# EAGLE board VCO eagle (EAGLE 6.6.0)
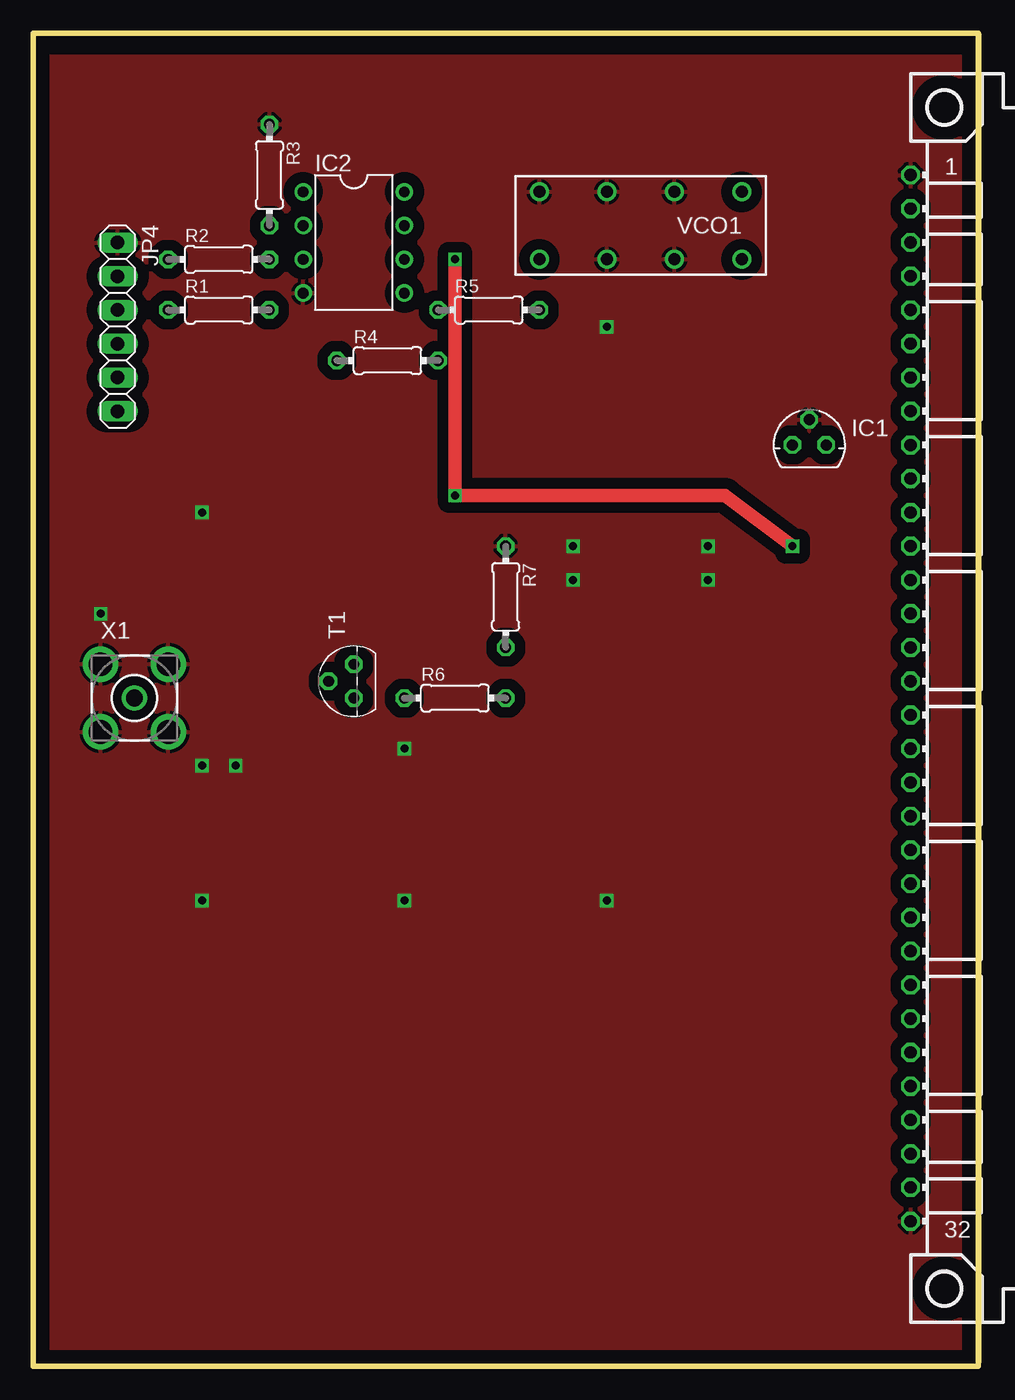
[diagram p0: board, top side]
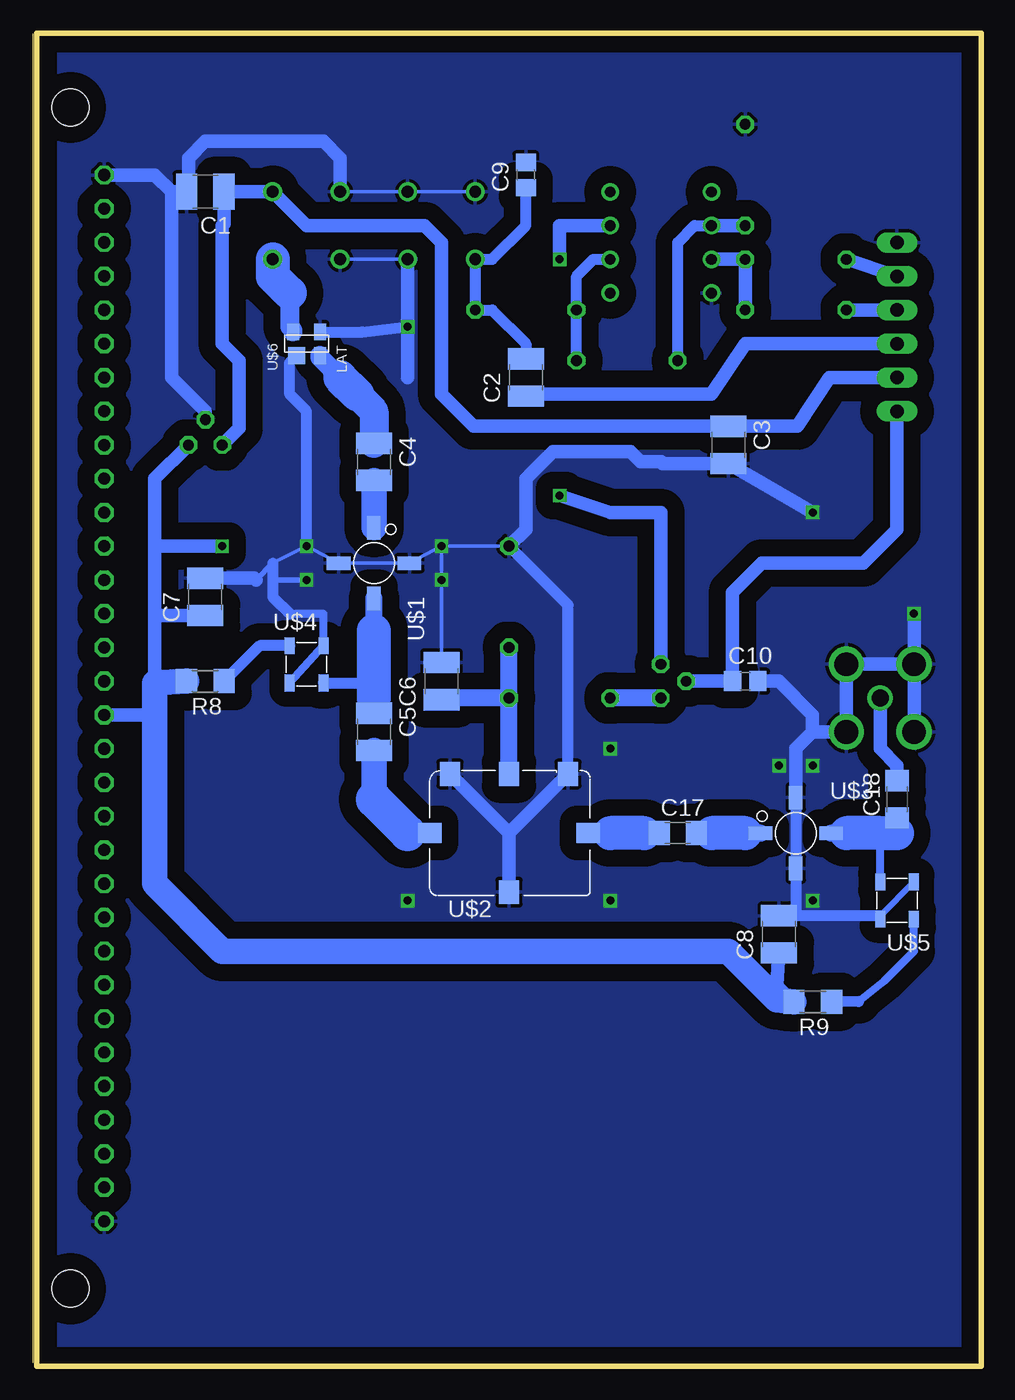
[diagram p1: board, bottom side, seen from below]

Size 71.12 x 100.33 mm. Coordinates in mm from the lower left corner, seen from the top.
Outline: 0,0 0,100.33 71.12,100.33 71.12,0 0,0
Copper layers (1*16): Top 0.035mm / dielectric 1.5mm / Bottom 0.035mm
Design rules "default": minimum track width 10mil, minimum drill 24mil, track to track 8mil, track to pad 8mil, pad to pad 8mil, via to via 8mil, smd to smd 8mil, copper to edge 40mil, drill to drill 8mil, minimum pad ring 10mil, minimum via ring 8mil, stop-mask expansion 4mil, vias tented up to drill 0mil, thermal gap 10mil
Net classes: 1 stripline: width 2.286 mm, clearance 2.54 mm

## Footprints (pad centres in the part's own frame; a part is rotated, then mirrored left to right if it is on the bottom)
C1210 = smd 1.6 x 2.7: 1 -1.4,0; 2 1.4,0
C0805 = smd 1.3 x 1.5: 1 -0.95,0; 2 0.95,0
C1206 = smd 1.6 x 1.8: 1 -1.4,0; 2 1.4,0
78LXX = drill 0.813 octagon: GND 0,1.905; IN 1.27,0; OUT -1.27,0
DIL08 = drill 0.813 pad 1.27: 1 -3.81,-3.81; 2 -1.27,-3.81; 3 1.27,-3.81; 4 3.81,-3.81; 5 3.81,3.81; 6 1.27,3.81; 7 -1.27,3.81; 8 -3.81,3.81
1X06 = drill 1.016 long: 1 -6.35,0; 2 -3.81,0; 3 -1.27,0; 4 1.27,0; 5 3.81,0; 6 6.35,0
0204/7 = drill 0.813 octagon: 1 -3.81,0; 2 3.81,0
R1206 = smd 1.6 x 1.803: 1 -1.422,0; 2 1.422,0
TO92 = drill 0.813 octagon: 1 1.27,0; 2 0,1.905; 3 -1.27,0
MAR = smd 1.016 x 1.778: G2 0,2.667; G4 0,-2.667 | smd 1.778 x 1.016: IN -2.667,0; OUT/VCC 2.667,0
TTT166 = smd 1.524 x 1.778: CTRL 0,-4.445; G4 0,4.445; G5 -4.445,-4.445; G6 4.445,-4.445 | smd 1.778 x 1.524: IN 5.969,0; OUT -5.969,0
PL-147 = smd 0.762 x 1.27: 1 -1.27,1.397; 2 1.27,1.397; 3 1.27,-1.397; 4 -1.27,-1.397
MMM168 = smd 0.889 x 1.27: P$1 -1.016,0.889; P$2 1.016,0.889; P$3 1.016,-0.889 | smd 1.27 x 1.27: P$4 -0.762,-0.889
A01 = drill 0.9 pad 1.422: 1 -10.16,-3.81; 2 -10.16,1.27; 3 -5.08,-3.81; 4 -5.08,1.27; 5 0,-3.81; 6 0,1.27; 7 5.08,-3.81; 8 5.08,1.27
BU-SMA-V = drill 1.27: 1 0,0 | drill 1.778: 2 -2.55,2.55; 3 2.55,2.55; 4 2.55,-2.55; 5 -2.55,-2.55
MAB32 = drill 0.914 octagon: A1 -2.54,39.37; A2 -2.54,36.83; A3 -2.54,34.29; A4 -2.54,31.75; A5 -2.54,29.21; A6 -2.54,26.67; A7 -2.54,24.13; A8 -2.54,21.59; A9 -2.54,19.05; A10 -2.54,16.51; A11 -2.54,13.97; A12 -2.54,11.43; A13 -2.54,8.89; A14 -2.54,6.35; A15 -2.54,3.81; A16 -2.54,1.27; A17 -2.54,-1.27; A18 -2.54,-3.81; A19 -2.54,-6.35; A20 -2.54,-8.89; A21 -2.54,-11.43; A22 -2.54,-13.97; A23 -2.54,-16.51; A24 -2.54,-19.05; A25 -2.54,-21.59; A26 -2.54,-24.13; A27 -2.54,-26.67; A28 -2.54,-29.21; A29 -2.54,-31.75; A30 -2.54,-34.29; A31 -2.54,-36.83; A32 -2.54,-39.37 | hole 2.794: 0,44.45; 0,-44.45

## Placement (x,y rotation side)
C1  0.1  [C1210]  58.42,88.39 180 bottom
C2  0.1  [C1210]  34.29,74.42 90 bottom
C3  0.1  [C1210]  19.05,69.34 270 bottom
C4  0.1  [C1210]  45.72,68.07 270 bottom
C5  0.1  [C1210]  45.72,47.75 270 bottom
C6  0.1  [C1210]  40.64,51.56 90 bottom
C7  0.1  [C1210]  58.42,57.91 90 bottom
C8  0.1  [C1210]  15.24,32.51 90 bottom
C9  100pF  [C0805]  34.29,89.66 90 bottom
C10  1000pF  [C0805]  17.78,51.56 0 bottom
C17  0.1  [C1206]  22.86,40.13 0 bottom
C18  0.1  [C1206]  6.35,42.67 90 bottom
IC1  78L12  [78LXX]  58.42,69.34 0 top
IC2  CA3140N  [DIL08]  24.13,84.58 270 top
JP4  [1X06]  6.35,78.23 270 top
R1  10k  [0204/7]  13.97,79.5 0 top
R2  10k  [0204/7]  13.97,83.31 0 top
R3  10k  [0204/7]  17.78,89.66 270 top
R4  10k  [0204/7]  26.67,75.69 0 top
R5  10k  [0204/7]  34.29,79.5 0 top
R6  500  [0204/7]  31.75,50.29 0 top
R7  50  [0204/7]  35.56,57.91 270 top
R8  270  [R1206]  58.42,51.56 180 bottom
R9  180  [R1206]  12.7,27.43 180 bottom
T1  2N3904  [TO92]  24.13,51.56 90 top
U$1  MAR3  [MAR]  45.72,60.45 270 bottom
U$2  SYAS-1  [TTT166]  35.56,40.13 180 bottom
U$3  MAV11  [MAR]  13.97,40.13 0 bottom
U$4  TCCH-80  [PL-147]  50.8,52.83 0 bottom
U$5  TCCH-80  [PL-147]  6.35,35.05 180 bottom
U$6  LAT  [MMM168]  50.8,76.96 0 bottom
VCO1  [A01]  43.18,84.58 180 top
X1  BU-SMA-V  [BU-SMA-V]  7.62,50.29 0 top
X2  MAB32  [MAB32]  68.58,50.29 0 top

## Library data of the parts
C1-C10 C17 C18 R1-R9 = rcl
IC1 = v-reg
IC2 = linear
JP4 = pinhead
T1 = transistor
U$1-U$5 VCO1 = minicircuits
U$6 = minicirNew
X1 = con-coax
X2 = con-vg

## Nets
+12V: C1.1 C3.1 IC1.OUT JP4.5 VCO1.1
+15V: C7.1 C8.1 IC1.IN IC2.7 R8.2 R9.2 T1.1 X2.A17
AMP: C10.1 JP4.6 T1.2
GND: C1.2 C3.2 C6.2 C7.2 C8.2 C9.2 C10.2 IC1.GND IC2.4 JP4.1 R3.1 R7.1 U$1.G2 U$1.G4 U$2.G4 U$2.G5 U$2.G6 U$3.G2 U$3.G4 U$4.2 U$4.4 U$5.2 U$5.4 U$6.P$2 U$6.P$4 VCO1.3 VCO1.4 VCO1.5 VCO1.6 VCO1.7 X1.2 X1.3 X1.4 X1.5 X2.A1 X2.A32
N$31: R6.1 T1.3
N$33: JP4.2 R2.1
N$34: IC2.3 R1.2 R2.2
N$35: IC2.2 R3.2 R4.1
N$36: IC2.6 R4.2 R5.1
N$37: C6.1 R6.2 R7.2 U$2.CTRL
N$38: C2.1 JP4.4
N$39: C2.2 C9.1 R5.2 VCO1.8
N$40: R9.1 U$5.1
N$41 [stripline]: U$6.P$1 VCO1.2
N$42 [stripline]: C4.1 U$6.P$3
N$43 [stripline]: C4.2 U$1.IN
N$44 [stripline]: C5.1 U$1.OUT/VCC U$4.3
N$45 [stripline]: C5.2 U$2.IN
N$46 [stripline]: C17.2 U$3.IN
N$47 [stripline]: C18.1 U$3.OUT/VCC U$5.3
N$48: R8.1 U$4.1
N$49 [stripline]: C17.1 U$2.OUT
N$50: C18.2 X1.1
N$51: JP4.3 R1.1

## Tracks (layer width: path | path; a pad name or v marks a point on that pad's centre or on a via)
+12V
  Bottom 1.016: JP4.5 11.43,74.42 13.84,70.74 C3.1 38.23,70.74 40.64,73.15 40.64,84.58 41.91,85.85 50.8,85.85 VCO1.1 C1.1 57.02,85.98 57.15,85.85 57.15,76.96 55.88,75.69 55.88,70.61 IC1.OUT
+15V  (via drill 0.6)
  Top 1.016: v31.75,83.31 v31.75,65.53 52.07,65.53 v57.15,61.72
  Bottom 0.813: R9.2 15.39,28.72
  Bottom 1.016: T1.1 24.13,64.26 27.94,64.26 v31.75,65.53 | IC2.7 31.75,85.85 v31.75,83.31 | 15.39,28.72 C8.1 | 62.23,49.02 X2.A17 | IC1.IN 62.23,66.8 62.23,61.72 | 62.23,51.41 62.23,56.64 | 62.23,56.64 62.23,61.72 | 62.23,61.72 v57.15,61.72 | C7.1 62.1,56.51 62.23,56.64
  Bottom 1.93: R9.2 15.39,27.58 19.05,31.24 57.15,31.24 62.23,36.32 62.23,49.02 62.23,51.41 R8.2
AMP
  Bottom 1.016: T1.2 C10.1 18.73,58.23 16.51,60.45 8.89,60.45 6.35,62.99 JP4.6
GND  (via drill 0.6)
  Bottom 0.254: v40.64,61.72 U$1.G2 U$1.G4 v50.8,61.72 53.34,60.45 | v40.64,61.72 R7.1 | C6.2 v40.64,59.18 v40.64,61.72 | VCO1.4 VCO1.6 | VCO1.7 VCO1.5 VCO1.3 | U$2.G6 40.64,45.21
  Bottom 0.406: 53.34,60.45 54.61,59.18 | 40.64,52.83 C6.2 | 53.34,59.18 v50.8,59.18 | U$5.4 7.62,33.91
  Bottom 0.61: 7.62,33.91 U$5.2 | 52.07,56.64 49.53,56.64 U$4.2 U$4.4
  Bottom 0.813: 52.07,56.64 53.34,57.91 53.34,59.18 53.34,60.45 | U$6.P$2 46.61,77.85 v43.18,78.23 | v50.8,61.72 50.8,71.88 52.07,73.15 52.07,75.56 U$6.P$4 | U$2.G5 31.12,57.28 R7.1 | 7.62,33.91 13.97,33.91 | 13.97,33.91 C8.2 | 13.97,33.91 U$3.G4 U$3.G2
  Bottom 1.016: X1.2 X1.3 X1.4 12.71,47.74 | 12.71,47.74 13.97,46.48 U$3.G2 | X1.5 X1.2 | 60.96,88.39 C1.2 59.69,88.52 59.69,90.93 58.42,92.2 49.53,92.2 48.26,90.93 VCO1.3 | 60.96,88.39 62.23,89.66 X2.A1 | v12.7,64.26 C3.2 24,67.94 24.13,68.07 25.65,68.07 26.42,68.83 32.26,68.83 34.29,66.8 34.29,62.99 R7.1 | IC1.GND 58.42,71.88 60.96,74.42 60.96,88.39 | C7.2 54.74,59.31 54.61,59.18 | X1.2 v5.07,56.63 v5.08,56.64 | 35.56,40.13 U$2.G5 | U$2.G4 35.56,40.13 | 35.56,40.13 U$2.G6 | 12.71,47.74 12.71,49.03 15.24,51.56 C10.2 | VCO1.6 v43.18,78.23 43.18,74.42
  other vias: 15.24,45.21 12.7,45.21 12.7,35.05 43.18,35.05 27.94,35.05 27.94,46.48
  pour Top (isolate 0.813): 69.85,0.76 69.85,98.55 -3.81,98.55 -3.81,0.76
  pour Bottom (isolate 1.27): 1.27,0.76 1.27,99.82 69.85,99.82 69.85,0.76
N$31
  Bottom 1.27: T1.3 R6.1
N$33
  Bottom 1.016: JP4.2 R2.1
N$34
  Bottom 1.016: R1.2 R2.2 IC2.3
N$35
  Bottom 0.813: R4.1 22.86,84.58 21.59,85.85 IC2.2
  Bottom 1.016: IC2.2 R3.2
N$36
  Bottom 0.813: IC2.6 29.21,83.31 30.48,82.04 R5.1 R4.2
N$37
  Bottom 1.27: U$2.CTRL R6.2 | R6.2 R7.2 | R6.2 40.51,50.29 C6.1
N$38
  Bottom 1.016: C2.1 32.89,73.15 20.32,73.15 17.78,76.96 JP4.4
N$39
  Bottom 0.813: C2.2 34.29,76.96 36.83,79.5 R5.2 VCO1.8 36.83,83.31 34.29,85.85 C9.1
N$40
  Bottom 0.61: 9.25,27.46 7.34,28.98 5.08,31.24 U$5.1
  Bottom 0.813: 9.25,27.46 R9.1
N$41
  Bottom 1.422: 52.07,80.77 52.07,78.23 51.82,77.98 U$6.P$1
  Bottom 2.54: VCO1.2 53.34,82.04 52.07,80.77
N$42
  Bottom 1.422: U$6.P$3 49.78,75.95 48.26,74.42
  Bottom 2.184: 46.99,73.15 45.72,71.88 C4.1
  Bottom 2.54: 46.99,73.15 48.26,74.42
N$43
  Bottom 1.93: U$1.IN C4.2
N$44
  Bottom 0.813: 45.72,51.56 45.85,51.43 U$4.3
  Bottom 1.27: 45.72,55.37 U$1.OUT/VCC | C5.1 45.72,50.29
  Bottom 2.54: 45.72,50.29 45.72,51.56 45.72,55.37
N$45
  Bottom 1.27: U$2.IN 43.18,40.13
  Bottom 1.93: 45.72,42.67 C5.2
  Bottom 2.743: 43.18,40.13 45.72,42.67
N$46
  Bottom 1.27: 20.32,40.13 C17.2 | U$3.IN 17.78,40.13
  Bottom 2.54: 17.78,40.13 20.32,40.13
N$47
  Bottom 0.61: U$5.3 7.62,40.13
  Bottom 0.813: 6.35,40.13 6.22,40
  Bottom 1.27: 10.16,40.13 U$3.OUT/VCC | 6.35,40.13 C18.1
  Bottom 2.54: 6.35,40.13 7.62,40.13 10.16,40.13
N$48
  Bottom 0.813: U$4.1 54.33,54.23 R8.1
N$49
  Bottom 1.27: 27.94,40.13 U$2.OUT | C17.1 25.4,40.13
  Bottom 2.54: 25.4,40.13 27.94,40.13
N$50
  Bottom 1.016: C18.2 6.35,45.21 7.62,46.48 X1.1
N$51
  Bottom 1.016: JP4.3 R1.1